# EAGLE board Aegis PCB 3D - 3 v26 (EAGLE 9.7.0)
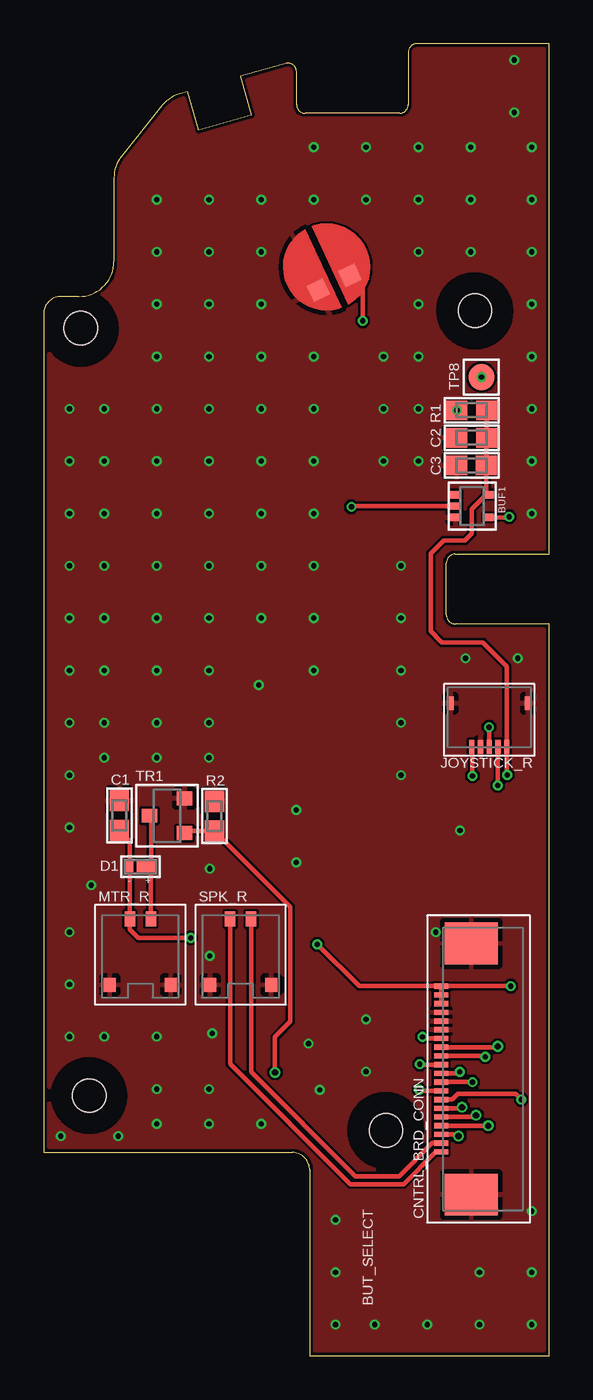
[diagram p0: board, top side]
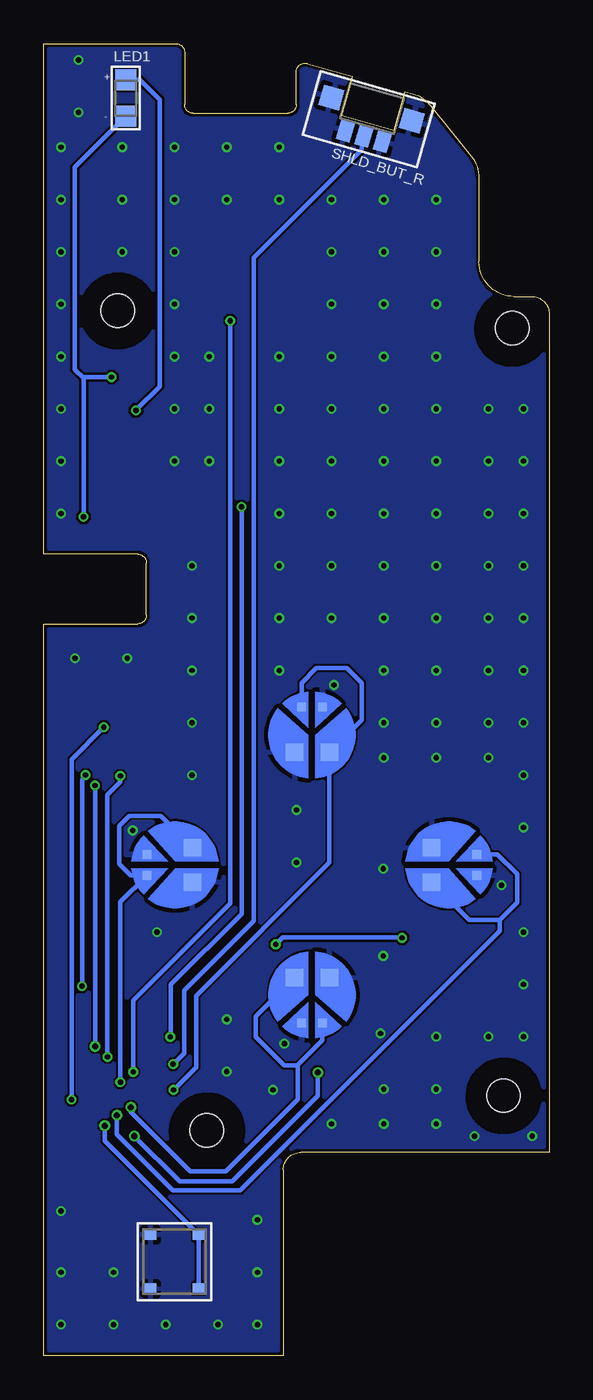
[diagram p1: board, bottom side, seen from below]

Size 28.98 x 75.24 mm. Coordinates in mm from the lower left corner, seen from the top.
Outline: 11.28,73.36 11.91,71.15 8.89,70.28 8.25,72.5 7.82,72.37 arc35 6.81,71.7 4.47,68.79 arc39 4.03,67.53 4.03,62.74 arc-90 2.03,60.74 1,60.74 arc90 0,59.74 0,11.66 14.25,11.66 arc-90 15.25,10.66 15.25,0 28.98,0 28.98,41.97 23.59,41.97 arc-90 23.09,42.47 23.09,45.47 arc-90 23.59,45.97 28.98,45.97 28.98,75.24 21.4,75.24 arc90 20.9,74.74 20.9,71.74 arc-90 20.4,71.24 15,71.24 arc-90 14.5,71.74 14.5,73.62 arc106 13.86,74.1 11.28,73.36
Copper layers (1*16): Top / Bottom
Stack-up Default Layer Stack: Top User Defined 0.035mm / Dielectric-1 User Defined 1.6mm / Bottom User Defined 0.035mm
Design rules "jlcpcb *": minimum track width 5mil, minimum drill 0.3mm, track to track 5mil, track to pad 5mil, pad to pad 5mil, via to via 5mil, smd to smd 5mil, copper to edge 0.2mm, drill to drill 6mil, minimum pad ring 0.13mm, minimum via ring 0.13mm, stop-mask expansion 4mil, vias tented up to drill 0mil, thermal gap 10mil
Holes 1.9 mm at 19.63,12.93 2.13,58.93 2.63,14.93 24.73,59.93

## Footprints (pad centres in the part's own frame; a part is rotated, then mirrored left to right if it is on the bottom)
BUF-74LVC1G07 = smd 0.42 x 0.6: A 0,-0.95; GND 0.65,-0.95; NC -0.65,-0.95; VCC -0.65,0.95; Y 0.65,0.95
BUT-R-667834 = smd 0.6 x 0.65: A1 -1.55,-1.375; A2 1.55,-1.375; B1 -1.55,1.375; B2 1.55,1.375
CAP-603 = smd 1.2 x 1.1: A -0.85,0; C 0.85,0
CONN-0527462033 = smd 0.3 x 0.8: 1 -4.75,2; 2 -4.25,2; 3 -3.75,2; 4 -3.25,2; 5 -2.75,2; 6 -2.25,2; 7 -1.75,2; 8 -1.25,2; 9 -0.75,2; 10 -0.25,2; 11 0.25,2; 12 0.75,2; 13 1.25,2; 14 1.75,2; 15 2.25,2; 16 2.75,2; 17 3.25,2; 18 3.75,2; 19 4.25,2; 20 4.75,2 | smd 2.4 x 3.05: MP1 7.2,0.275; MP2 -7.2,0.275
DIODE-X3-WLB1608-2 = smd 1.035 x 0.69: A 0.293,0 | smd 0.385 x 0.69: C -0.619,0
CONN-046809605110846+ = smd 0.3 x 0.8: 1 -1,0; 2 -0.5,0; 3 0,0; 4 0.5,0; 5 1,0 | smd 0.4 x 0.8: MP1 2.225,-2.5; MP2 -2.225,-2.5
LED-SM0805UWC = smd 1.2 x 1.2: A 0,1.05; C 0,-1.05
CONN-0781710002 = smd 0.6 x 0.85: 1 -0.6,0; 2 0.6,0 | smd 0.7 x 0.8: MP1 -1.75,-3.775; MP2 1.75,-3.775
AEGIS-BUTTONPAD = smd 1 x 1: P$1 -1,-1; P$2 1,-1 | smd 0.5 x 0.5: P$3 0.6,1.6; P$4 -0.6,1.6
AEGIN-SHLDPAD = smd 1 x 1: P$1 -1,-1; P$2 1,-1
RES-603 = smd 1.2 x 1.1: A -0.85,0; C 0.85,0
AEGIN-SHLDBUT = smd 0.8 x 1.2: A 0,-0.6; B1 -1.1,-0.6; B2 1.1,-0.6 | smd 1.2 x 1.2: MP1 -2.4,1; MP2 2.4,1
TESTPOINT = smd 1.5 x 1.5: TP 0,0
TRAN-DMG2302UKQ = smd 0.8 x 0.9: D 0,1; G -1,-1; S 1,-1

## Placement (x,y rotation side)
BUF1  BUF-74LVC1G07  [BUF-74LVC1G07]  24.56,48.73 270 top
BUT_SELECT  BUT-R-667834  [BUT-R-667834]  21.48,5.4 270 bottom
C1  0.1uF  [CAP-603]  4.34,30.99 270 top
C2  0.1uF  [CAP-603]  24.54,52.64 0 top
C3  10uF  [CAP-603]  24.53,51.06 0 top
CNTRL_BRD_CONN  CONN-0527462033  [CONN-0527462033]  24.78,16.45 90 top
D1  [DIODE-X3-WLB1608-2]  5.56,28.05 0 top
JOYSTICK_R  CONN-046809605110846+  [CONN-046809605110846+]  25.54,34.92 180 top
LED1  LED-SM0805UWC  [LED-SM0805UWC]  24.26,72.12 0 bottom
MTR_R  CONN-0781710002  [CONN-0781710002]  5.54,25.05 0 top
PAD_A  AEGIS-BUTTONPAD  [AEGIS-BUTTONPAD]  5.75,28.15 270 bottom
PAD_B  AEGIS-BUTTONPAD  [AEGIS-BUTTONPAD]  13.6,20.7 180 bottom
PAD_TRIGGER_R  AEGIN-SHLDPAD  [AEGIN-SHLDPAD]  16.23,62.43 25 top
PAD_X  AEGIS-BUTTONPAD  [AEGIS-BUTTONPAD]  13.6,35.6 0 bottom
PAD_Y  AEGIS-BUTTONPAD  [AEGIS-BUTTONPAD]  21.45,28.15 90 bottom
R1  2.2K  [RES-603]  24.54,54.22 0 top
R2  10K  [RES-603]  9.79,30.95 270 top
SHLD_BUT_R  AEGIN-SHLDBUT  [AEGIN-SHLDBUT]  10.45,70.52 344 bottom
SPK_R  CONN-0781710002  [CONN-0781710002]  11.29,25.05 0 top
TP8  TESTPOINT  [TESTPOINT]  25.09,56.12 90 top
TR1  [TRAN-DMG2302UKQ]  7.07,30.97 90 top

## Library data of the parts
BUF1 BUT_SELECT C1-C3 CNTRL_BRD_CONN D1 JOYSTICK_R LED1 MTR_R PAD_A PAD_B PAD_TRIGGER_R PAD_X PAD_Y R1 R2 SHLD_BUT_R SPK_R TP8 TR1 = Personal

## Nets
A_SIG: CNTRL_BRD_CONN.5 PAD_A.P$2 PAD_A.P$4
B_SIG: CNTRL_BRD_CONN.6 PAD_B.P$2 PAD_B.P$4
BUT_R3: CNTRL_BRD_CONN.7 JOYSTICK_R.3
CHG_LED: BUF1.A CNTRL_BRD_CONN.14
GND: BUF1.GND BUT_SELECT.A1 BUT_SELECT.A2 C1.A C2.A C3.A CNTRL_BRD_CONN.15 CNTRL_BRD_CONN.16 CNTRL_BRD_CONN.17 CNTRL_BRD_CONN.MP1 CNTRL_BRD_CONN.MP2 JOYSTICK_R.4 JOYSTICK_R.MP1 JOYSTICK_R.MP2 MTR_R.MP1 MTR_R.MP2 PAD_A.P$1 PAD_A.P$3 PAD_B.P$1 PAD_B.P$3 PAD_TRIGGER_R.P$1 PAD_X.P$1 PAD_X.P$3 PAD_Y.P$1 PAD_Y.P$3 R2.A SHLD_BUT_R.B1 SHLD_BUT_R.B2 SHLD_BUT_R.MP1 SHLD_BUT_R.MP2 SPK_R.MP1 SPK_R.MP2 TR1.S
JOY_R_L/R: CNTRL_BRD_CONN.12 JOYSTICK_R.5
JOY_R_U/D: CNTRL_BRD_CONN.13 JOYSTICK_R.2
MOT_CNTRL_R: CNTRL_BRD_CONN.3 R2.C TR1.G
N$8: D1.A MTR_R.2 TR1.D
N$50: LED1.A R1.A
N$51: BUF1.Y LED1.C TP8.TP
SELECT_SIG: BUT_SELECT.B1 BUT_SELECT.B2 CNTRL_BRD_CONN.4
SHLD_R_SIG: CNTRL_BRD_CONN.11 SHLD_BUT_R.A
SPKR+: CNTRL_BRD_CONN.1 SPK_R.1
SPKR-: CNTRL_BRD_CONN.2 SPK_R.2
TRIG_R_SIG: CNTRL_BRD_CONN.10 PAD_TRIGGER_R.P$2
VREF3.3: BUF1.VCC C1.C C2.C C3.C CNTRL_BRD_CONN.18 CNTRL_BRD_CONN.19 CNTRL_BRD_CONN.20 D1.C JOYSTICK_R.1 MTR_R.1 R1.C
X_SIG: CNTRL_BRD_CONN.8 PAD_X.P$2 PAD_X.P$4
Y_SIG: CNTRL_BRD_CONN.9 PAD_Y.P$2 PAD_Y.P$4

## Tracks (layer width: path | path; a pad name or v marks a point on that pad's centre or on a via)
A_SIG  (via drill 0.35)
  Top 0.254: v24.78,13.8 24.68,13.7 CNTRL_BRD_CONN.5
  Bottom 0.254: PAD_A.P$4 2.97,28.75 1.84,27.62 1.84,25.99 2.83,25 | PAD_A.P$2 4.6,25 2.83,25 | v24.78,13.8 24.78,12.7 21.58,9.5 17.7,9.5 2.83,24.37 2.83,25
B_SIG  (via drill 0.35)
  Top 0.254: v23.98,14.26 23.92,14.2 CNTRL_BRD_CONN.6
  Bottom 0.254: PAD_B.P$4 13,18.09 14.41,16.68 | 14.41,16.68 14.43,16.66 15.2,16.66 16.83,18.29 16.83,19.47 PAD_B.P$2 | 14.41,16.68 14.41,14.72 18.54,10.59 20.58,10.59 23.98,13.99 v23.98,14.26
BUT_R3  (via drill 0.3)
  Top 0.254: v25.53,36.05 v25.54,36.04 JOYSTICK_R.3 | CNTRL_BRD_CONN.7 23.43,14.7 23.75,15.02 27.06,15.02 v27.38,14.7
  Bottom 0.254: v27.38,14.7 27.38,34.2 v25.53,36.05
CHG_LED  (via drill 0.3)
  Top 0.254: BUF1.A 17.69,48.73 v17.64,48.68 | CNTRL_BRD_CONN.14 21.8,18.2 v21.72,18.29
  Bottom 0.254: v17.64,48.68 v17.63,48.67 17.63,25.35 21.68,21.3 21.68,18.33 v21.72,18.29
GND  (via drill 0.3)
  other vias: 15.18,17.9 2.73,26.99 12.33,38.47 9.52,22.94 12.48,66.3 12.48,63.3 12.48,60.3 9.48,60.3 9.48,63.3 9.48,66.3 6.48,66.3 6.48,63.3 6.48,60.3 12.48,57.3 12.48,54.3 12.48,51.3 9.48,51.3 9.48,54.3 9.48,57.3 6.48,57.3 6.48,54.3 6.48,51.3 12.48,48.3 12.48,45.3 12.48,42.3 9.48,42.3 9.48,45.3 9.48,48.3 6.48,48.3 6.48,45.3 6.48,42.3 3.48,48.3 3.48,45.3 3.48,42.3 1.48,42.3 1.48,45.3 1.48,48.3 3.48,54.3 3.48,51.3 1.48,51.3 1.48,54.3 9.48,34.3 9.48,36.3 9.48,39.3 6.48,39.3 6.48,36.3 6.48,34.3 3.48,39.3 3.48,36.3 3.48,34.3 1.48,33.3 1.48,36.3 1.48,39.3 15.48,66.3 15.48,57.3 15.48,54.3 15.48,51.3 15.48,48.3 15.48,45.3 15.48,42.3 18.48,66.3 19.48,57.3 19.48,54.3 19.48,51.3 21.48,66.3 21.48,63.3 21.48,60.3 21.48,57.3 21.48,54.3 21.48,51.3 15.48,39.3 15.48,69.3 18.48,69.3 21.48,69.3 24.48,66.3 24.48,63.3 24.48,69.3 27.98,48.3 27.98,51.3 27.98,57.3 27.98,54.3 27.98,60.3 27.98,66.3 27.98,63.3 27.98,69.3 26.98,71.3 26.98,74.3 27.18,40 24.18,40 16.73,4.8 21.98,1.8 18.98,1.8 16.73,1.8 9.48,15.3 6.48,15.3 1.48,21.3 1.48,24.3 6.48,18.3 3.48,18.3 12.48,13.3 9.48,13.3 6.48,13.3 4.28,12.6 0.98,12.6 1.48,18.3 9.52,27.94 23.87,30.12 15.83,15.25 20.48,45.3 20.48,42.3 20.48,39.3 20.48,36.3 20.48,33.3 14.48,31.3 14.48,28.3 18.48,19.3 18.48,16.3 22.48,24.3 27.98,1.8 24.98,1.8 24.98,4.8 27.98,8.3 27.98,4.8 16.73,7.8 1.48,30.3 9.67,18.49
  pour Top (rank 2): -3.93,76.8 -3.93,-1.47 -3.83,-1.57 32.23,-1.57 32.23,76.7 4.87,76.7
  pour Bottom (rank 2): -3.41,76.28 -3.41,-0.63 30.45,-0.63 30.45,76.17 26.99,76.17
JOY_R_L/R  (via drill 0.3)
  Top 0.254: v24.58,33.25 24.58,34.88 JOYSTICK_R.5 | v25.32,17.15 25.08,17.15 25.03,17.2 CNTRL_BRD_CONN.12
  Bottom 0.254: v24.58,33.25 24.58,32.9 25.33,32.15 25.33,17.17 v25.32,17.15
JOY_R_U/D  (via drill 0.3, 0.35)
  Top 0.254: v26.03,32.7 v26.04,32.71 JOYSTICK_R.2 | CNTRL_BRD_CONN.13 25.98,17.7 v26.03,17.75
  Bottom 0.254: v26.03,32.7 v26.03,17.75
MOT_CNTRL_R  (via drill 0.35)
  Top 0.254: TR1.G 8.2,30.1 R2.C 14.15,25.75 14.15,19.17 13.26,18.29 v13.26,16.25 | v23.78,12.6 23.68,12.7 CNTRL_BRD_CONN.3
  Bottom 0.254: v13.26,16.25 13.26,14.92 18.18,10 21.18,10 v23.78,12.6
N$8
  Top 0.254: TR1.D 6.16,30.89 6.16,28.35 D1.A 6.14,27.76 6.14,25.43 MTR_R.2
N$50  (via drill 0.3)
  Bottom 0.254: LED1.A 23.46,73.17 22.32,72.03 22.32,55.59 R1.A
  other vias: 23.69,54.22
N$51  (via drill 0.3)
  Top 0.254: BUF1.Y 26.66,48.08 v26.69,48.11
  Bottom 0.254: v26.69,48.11 26.69,56.06 | TP8.TP 26.63,56.12 26.69,56.06 | LED1.C 27.19,68.15 27.19,56.56 26.69,56.06
  other vias: 25.09,56.12
SELECT_SIG  (via drill 0.35)
  Top 0.254: v25.48,13.2 CNTRL_BRD_CONN.4
  Bottom 0.254: BUT_SELECT.B2 BUT_SELECT.B1 25.48,12.33 v25.48,13.2
SHLD_R_SIG  (via drill 0.3)
  Top 0.254: v21.56,16.73 21.56,16.7 CNTRL_BRD_CONN.11
  Bottom 0.254: SHLD_BUT_R.A 10.74,69.83 10.74,69.15 16.93,62.96 16.93,24.95 20.93,20.95 20.93,17.36 v21.56,16.73
SPKR+
  Top 0.254: SPK_R.1 10.69,16.74 17.58,9.85 20.63,9.85 22.48,11.7 CNTRL_BRD_CONN.1
SPKR-
  Top 0.254: SPK_R.2 11.89,16.28 17.87,10.3 20.37,10.3 22.28,12.21 CNTRL_BRD_CONN.2
TRIG_R_SIG  (via drill 0.3)
  Top 0.254: v18.29,59.35 18.29,61.21 PAD_TRIGGER_R.P$2 | v23.85,16.28 23.76,16.2 CNTRL_BRD_CONN.10
  Bottom 0.254: v18.29,59.35 v18.28,59.34 18.28,25.95 23.85,20.38 v23.85,16.28
VREF3.3  (via drill 0.3)
  Top 0.254: C1.C 4.94,29.54 D1.C 4.94,25.43 MTR_R.1 4.94,24.47 5.44,23.97 v8.43,23.97 | R1.C C2.C C3.C 25.38,49.51 BUF1.VCC 25.37,49.38 24.55,48.55 24.55,47.15 24.15,46.75 22.93,46.75 22.18,46 22.18,41.55 22.83,40.9 25.18,40.9 26.54,39.54 JOYSTICK_R.1 26.54,33.34 v26.57,33.3 | v15.68,23.6 18.08,21.2 CNTRL_BRD_CONN.20 | CNTRL_BRD_CONN.18 CNTRL_BRD_CONN.19 CNTRL_BRD_CONN.20 | v26.78,21.2 CNTRL_BRD_CONN.20
  Bottom 0.254: v26.78,21.2 26.78,33.06 26.57,33.27 v26.57,33.3 | v15.68,23.6 15.28,24 8.56,24 8.53,23.97 v8.43,23.97
  pour Top (no thermals): 22.38,19.85 22.38,18.55 23.17,18.55 23.17,19.85
X_SIG  (via drill 0.3)
  Top 0.254: CNTRL_BRD_CONN.8 21.58,15.2 v21.53,15.25
  Bottom 0.254: PAD_X.P$4 14.2,38.59 13.35,39.44 11.6,39.44 10.74,38.58 10.74,36.46 PAD_X.P$2 12.6,28.28 20.23,20.65 20.23,16.55 v21.53,15.25
Y_SIG  (via drill 0.3)
  Top 0.254: CNTRL_BRD_CONN.9 v24.58,15.7
  Bottom 0.254: PAD_Y.P$2 22.27,30.97 24.07,30.97 24.65,30.39 24.65,28.2 24,27.55 PAD_Y.P$4 24.58,26.02 v24.58,15.7
(copper drawn outside any net)
  shapes: Bottom area x4, Top area x4